# EAGLE board 04-bottom (EAGLE 9.6.2)
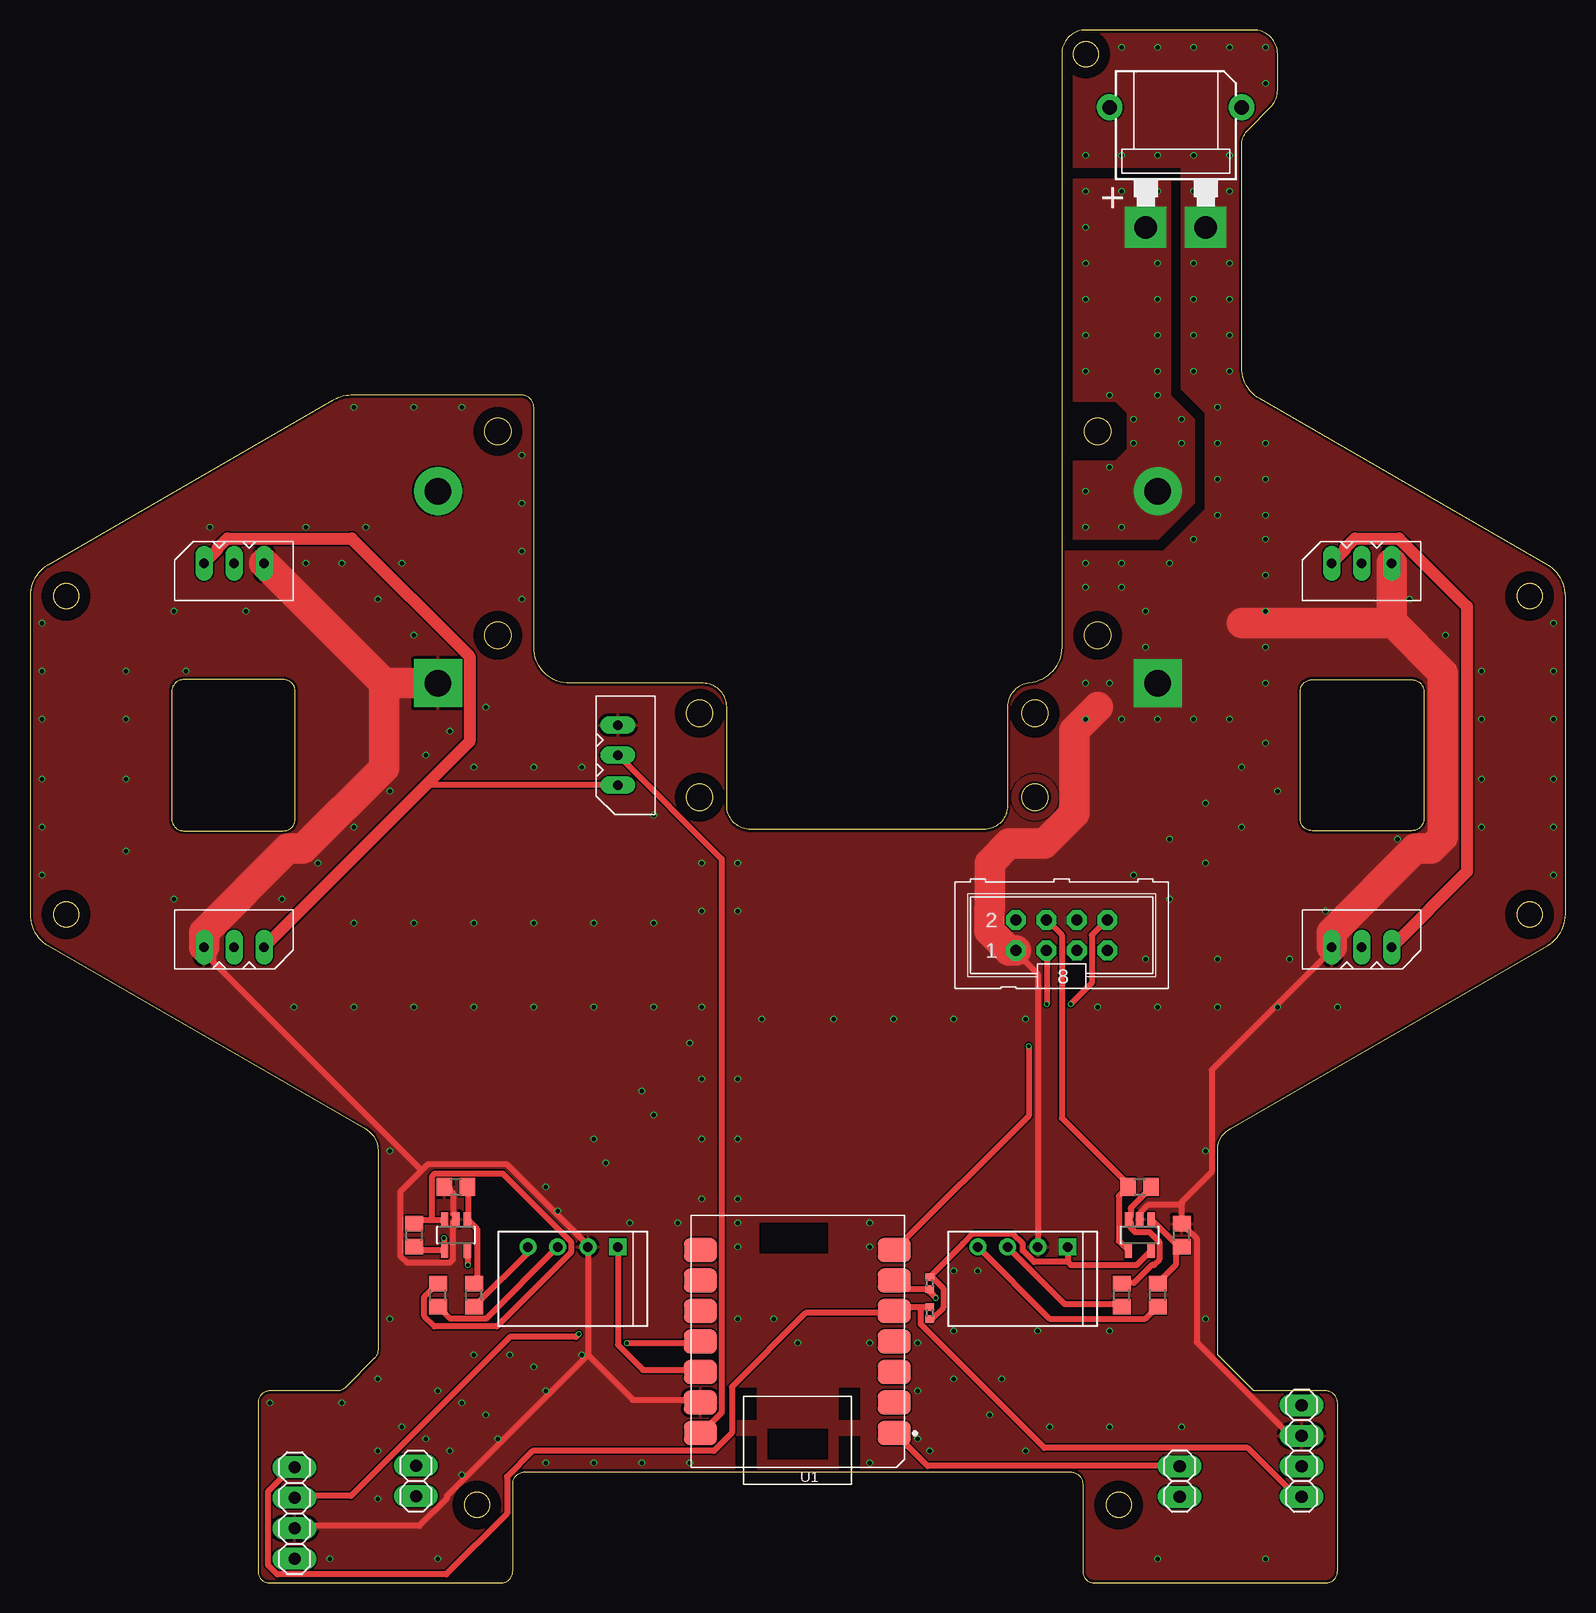
[diagram p0: board, top side]
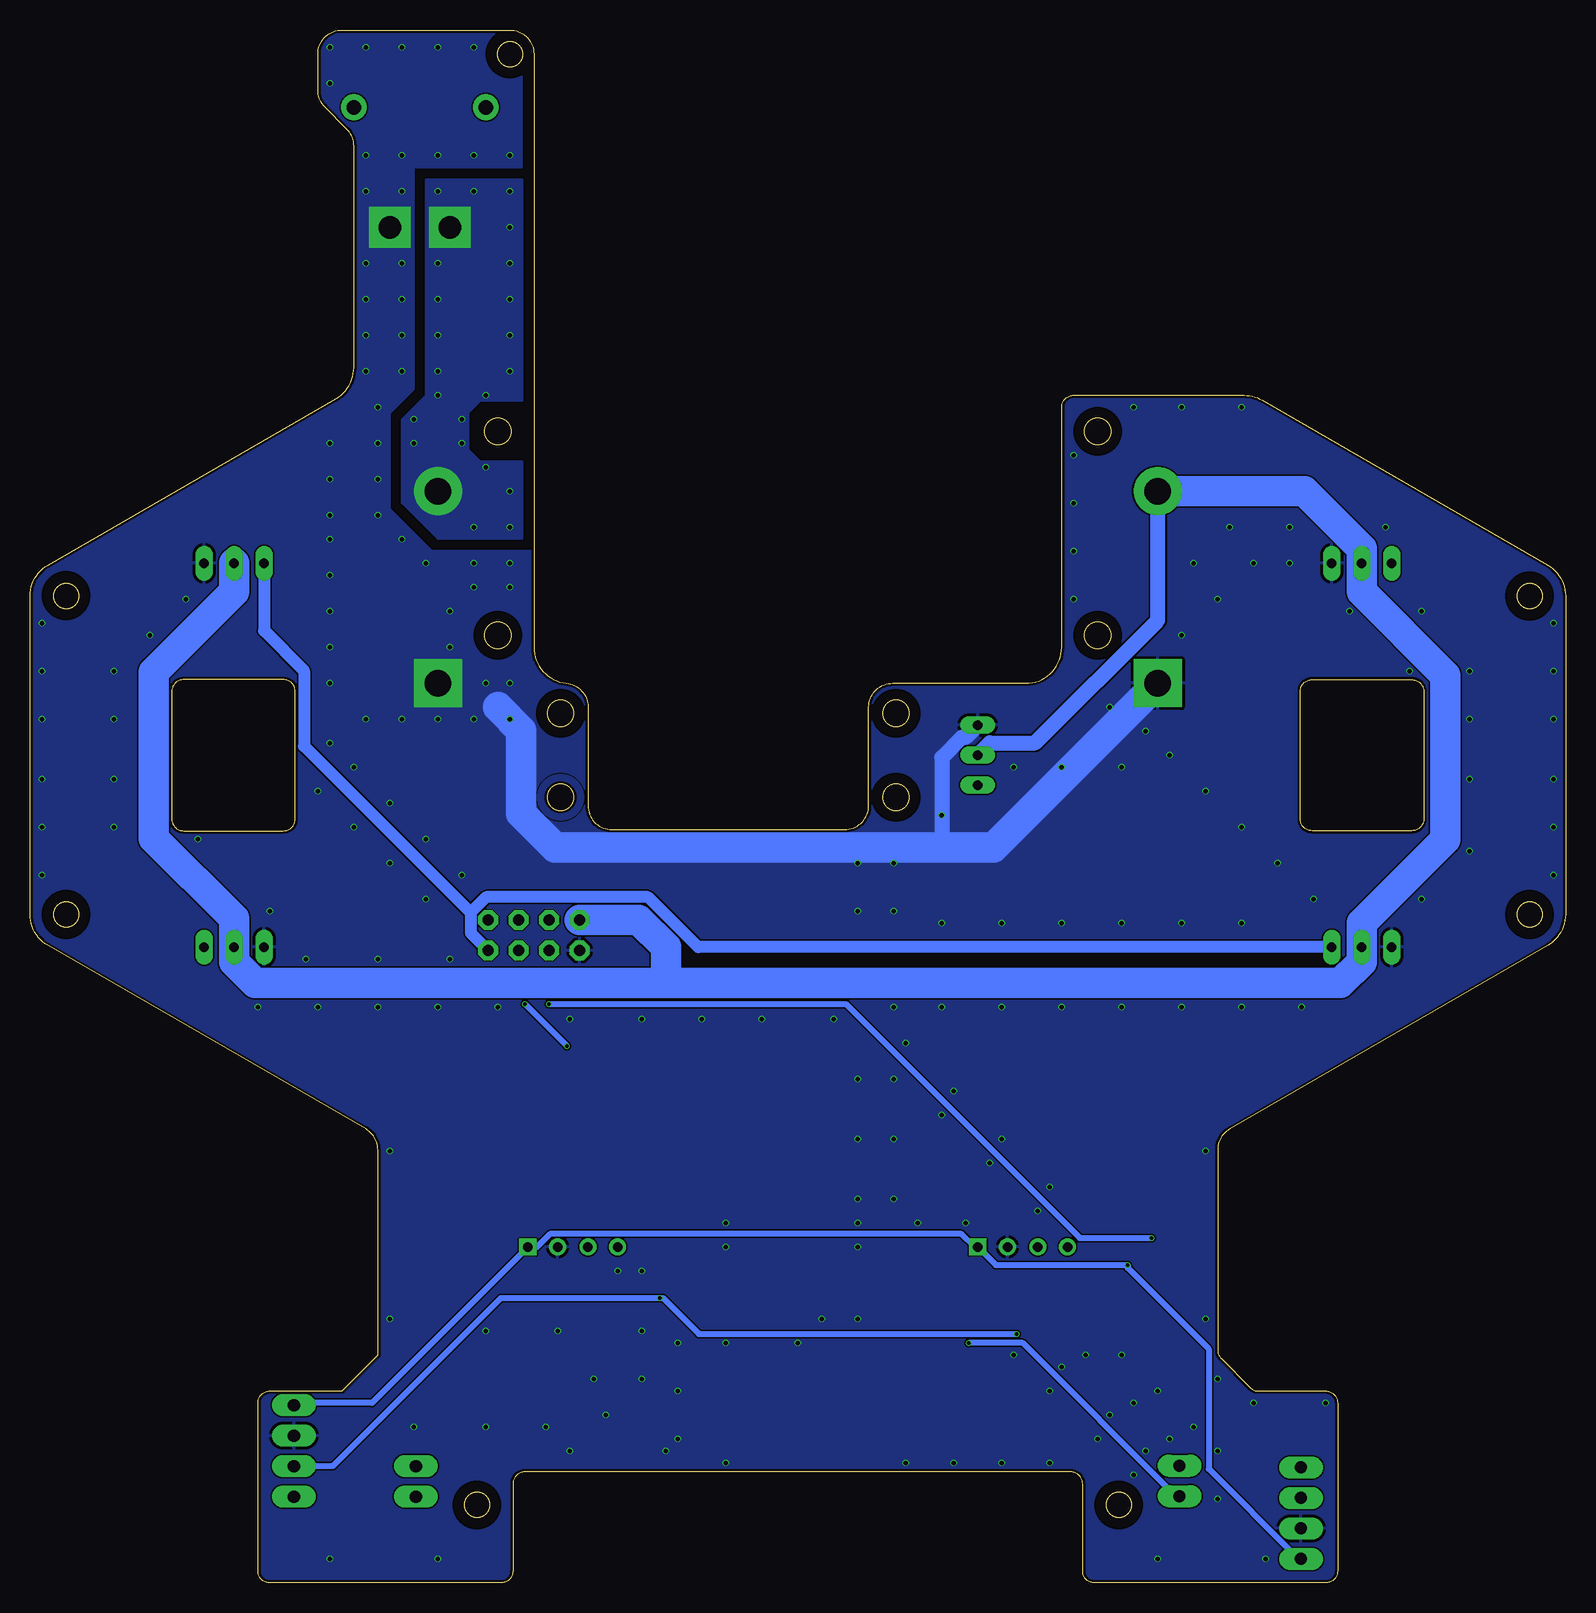
[diagram p1: board, bottom side, seen from below]

Size 128 x 129.45 mm. Coordinates in mm from the lower left corner, seen from the top.
Outline: 106.88,75.3 115.19,75.3 arc-90 116.19,74.3 116.19,63.7 arc-90 115.19,62.7 106.88,62.7 arc-90 105.88,63.7 105.88,74.3 arc-90 106.88,75.3
Outline: 22.12,74.3 arc90 21.12,75.3 12.81,75.3 arc90 11.81,74.3 11.81,63.7 arc90 12.81,62.7 21.12,62.7 arc90 22.12,63.7 22.12,74.3
Outline: 109,15 arc90 108,16 102,16 99,19 99,36.1 arc-60 100,37.83 126.5,53.13 arc60 128,55.73 128,82.27 arc60 126.5,84.87 102.5,98.72 arc-60 101,101.32 101,119.78 arc-45 101.59,121.19 103.41,123.02 arc45 104,124.44 104,127.45 arc90 102,129.45 88,129.45 arc90 86,127.45 86,78 arc-84 83.29,75.01 arc84 81.49,73.02 81.49,64.8 arc-90 79.49,62.8 60.09,62.8 arc-90 58.09,64.8 58.09,73 arc90 56.09,75 45,75 arc-90 42,78 42,98 arc90 41,99 26.78,99 arc30 25.28,98.6 1.5,84.87 arc60 0,82.27 0,55.73 arc60 1.5,53.13 28,37.83 arc-60 29,36.1 29,19.41 arc-45 28.71,18.71 26.29,16.29 arc-45 25.59,16 20,16 arc90 19,15 19,1 arc90 20,0 39.25,0 arc90 40.25,1 40.25,8.25 arc-90 41.25,9.25 86.75,9.25 arc-90 87.75,8.25 87.75,1 arc90 88.75,0 108,0 arc90 109,1 109,15
Outline: circle at 39,96 radius 1.1
Outline: circle at 39,79 radius 1.1
Outline: circle at 89,79 radius 1.1
Outline: circle at 88,127.45 radius 1.05
Outline: circle at 90.75,6.5 radius 1.05
Outline: circle at 37.25,6.5 radius 1.05
Outline: circle at 3,55.73 radius 1.05
Outline: circle at 3,82.27 radius 1.05
Outline: circle at 125,55.73 radius 1.05
Outline: circle at 125,82.27 radius 1.05
Outline: circle at 89,96 radius 1.1
Outline: circle at 83.78,65.5 radius 1.1
Outline: circle at 83.78,72.5 radius 1.1
Outline: circle at 55.8,65.5 radius 1.1
Outline: circle at 55.8,72.5 radius 1.1
Copper layers (1*16): Top 0.035mm / dielectric 1.6mm / Bottom 0.035mm
Design rules "jlcpcb-2layers *": minimum track width 5mil, minimum drill 0.3mm, track to track 5mil, track to pad 5mil, pad to pad 5mil, via to via 5mil, smd to smd 5mil, copper to edge 0.2mm, drill to drill 6mil, minimum pad ring 10mil, minimum via ring 3mil, stop-mask expansion 4mil, vias tented up to drill 10mil, thermal gap 10mil
Net classes: 0 default: width 0.508 mm
bKeepout: area 123,80.3 to 127,84.3; area 87,94 to 91,98; area 87,77 to 91,81; area 37,77 to 41,81; area 37,94 to 41,98
tRestrict: area 1,80.3 to 5,84.3; area 123,53.7 to 127,57.7; area 1,53.7 to 5,57.7; area 81.8,70.5 to 85.8,74.5; area 86,125.5 to 90,129.5; area 35.2,4.5 to 39.2,8.5; area 88.8,4.5 to 92.8,8.5; area 123,80.3 to 127,84.3; area 87,94 to 91,98; area 87,77 to 91,81; area 37,77 to 41,81; area 37,94 to 41,98; area 81.8,63.5 to 85.8,67.5; area 53.8,63.5 to 57.8,67.5; area 53.8,70.5 to 57.8,74.5
bRestrict: area 53.8,63.5 to 57.8,67.5; area 81.8,63.5 to 85.8,67.5; area 53.8,70.5 to 57.8,74.5; area 86,125.5 to 90,129.5; area 88.8,4.5 to 92.8,8.5; area 35.2,4.5 to 39.2,8.5; area 1,53.7 to 5,57.7; area 1,80.3 to 5,84.3; area 123,53.7 to 127,57.7; area 81.8,70.5 to 85.8,74.5; area 87,77 to 91,81; area 37,94 to 41,98; area 123,80.3 to 127,84.3; area 37,77 to 41,81

## Footprints (pad centres in the part's own frame; a part is rotated, then mirrored left to right if it is on the bottom)
SOT23-5 = smd 0.6 x 1.2: 1 -0.95,-1.306; 2 0,-1.306; 3 0.95,-1.306; 4 0.95,1.306; 5 -0.95,1.306
ML6 = drill 0.914 octagon: 1 -3.81,-1.27; 2 -3.81,1.27; 3 -1.27,-1.27; 4 -1.27,1.27; 5 1.27,-1.27; 6 1.27,1.27; 7 3.81,-1.27; 8 3.81,1.27
GND = drill 2.2 pad 4 square: P$1 0,0
5267-3 = drill 0.8 long: P$1 0,0; P$2 2.5,0; P$3 5,0
CON_22057045_MOL = drill 0.787 pad 1.143 square: 1 0,0 | drill 0.787 pad 1.143: 2 -2.489,0; 3 -5.004,0; 4 -7.493,0
1X04 = drill 1.016 long: 1 -3.81,0; 2 -1.27,0; 3 1.27,0; 4 3.81,0
1X02 = drill 1.016 long: 1 -1.27,0; 2 1.27,0
R0805 = smd 1.3 x 1.5: 1 -0.95,0; 2 0.95,0
R0402 = smd 0.6 x 0.7: 1 -0.5,0; 2 0.5,0
MOUDLE14P-2.54-21X17.8MM = smd 2.75 x 2: 1 0.835,18.12; 2 0.835,15.58; 3 0.835,13.04; 4 0.835,10.5; 5 0.835,7.96; 6 0.835,5.42; 7 0.835,2.88; 8 17,2.88; 9 17,5.42; 10 17,7.96; 11 17,10.5; 12 17,13.04; 13 17,15.58; 14 17,18.12
VDD = drill 2.2 pad 4: P$1 0,0
XT-30_L = drill 1.9 square: 1 3,-10; 2 8,-10 | drill 1.2: P$1 0,0; P$2 11,0

## Placement (x,y rotation side)
AMP1  NJU77551F  [SOT23-5]  92.5,29 180 top
AMP2  NJU77551F  [SOT23-5]  35.5,29 180 top
CN1  ML8-R  [ML6]  86,54 0 top
GND1  PAD_GND  [GND]  34,75 0 top
GND2  PAD_GND  [GND]  94,75 0 top
J1  5267-3  [5267-3]  19.5,53 180 top
J2  5267-3  [5267-3]  14.5,85 0 top
J3  5267-3  [5267-3]  108.5,85 0 top
J4  5267-3  [5267-3]  113.5,53 180 top
J5  22057045  [CON_22057045_MOL]  86.5,28 0 top
J6  22057045  [CON_22057045_MOL]  49,28 0 top
J7  5267-3  [5267-3]  49,66.5 90 top
JP1  [1X04]  22.06,5.83 90 top
JP2  [1X02]  32.17,8.5 90 top
JP3  [1X04]  106,11 270 top
JP4  [1X02]  95.84,8.46 270 top
R1  1k  [R0805]  94,24 90 top
R2  1k  [R0805]  91,24 90 top
R3  330k  [R0805]  96,29 90 top
R4  330k  [R0805]  92.5,33 180 top
R5  1k  [R0805]  37,24 90 top
R6  1k  [R0805]  34,24 90 top
R7  330k  [R0805]  35.5,33 180 top
R8  330k  [R0805]  32,29 270 top
R9  10k  [R0402]  75,22.5 270 top
R10  10k  [R0402]  75,25 90 top
U1  [MOUDLE14P-2.54-21X17.8MM]  72.89,30.63 180 top
VDD1  PAD_VDD  [VDD]  34,91 0 top
VDD_IN  PAD_VDD  [VDD]  94,91 0 top
XT1  XT-30_L  [XT-30_L]  90,123 0 top

## Library data of the parts
AMP1 AMP2 = NJU77551F
CN1 = ML8
GND1 GND2 VDD1 VDD_IN = M2-CONN
J1-J4 J7 = con-molex-spox
J5 J6 = con-molex-5268; COPYRIGHT: Copyright (C) 2022 Ultra Librarian. All rights reserved.; MANUFACTURER_PART_NUMBER: 22057045; MFR_NAME: Molex Connector Corporation
JP1-JP4 = pinhead
R1-R10 = rcl; SPICEPREFIX: R
U1 = Seeeduino XIAO
XT1 = XT-30

## Nets
+3V3: AMP1.5 AMP2.5 J5.1 J6.1 JP1.1 JP3.1 R9.2 R10.2 U1.12
BATT+: VDD_IN.P$1 XT1.1
GND: AMP1.2 AMP2.2 CN1.1 GND1.P$1 GND2.P$1 J1.P$3 J2.P$3 J3.P$3 J4.P$3 J5.2 J6.2 J7.P$3 JP1.2 JP3.2 R3.2 R7.2 U1.13 XT1.2
LED-FLOOR: CN1.6
LOADCELL-L: AMP1.4 CN1.4 R4.2
LOADCELL-R: AMP2.4 CN1.3 R8.2
MIRROR: CN1.8 U1.7
N$1: J5.3 R2.1
N$2: J5.4 R1.1
N$3: AMP1.3 R2.2 R4.1
N$4: AMP1.1 R1.2 R3.1
N$5: J6.3 R6.1
N$6: J6.4 R5.1
N$7: AMP2.3 R6.2 R8.1
N$8: AMP2.1 R5.2 R7.1
SCL: JP1.3 JP3.3 R10.1 U1.6
SDA: JP1.4 JP3.4 R9.1 U1.5
SERVO-SIG: CN1.7 J1.P$1 J2.P$1 J3.P$1 J4.P$1 J7.P$1
SIG-FLOOR: CN1.5
VDD: CN1.2 J1.P$2 J2.P$2 J3.P$2 J4.P$2 J7.P$2 U1.14 VDD1.P$1
XSHUT1: JP2.1 U1.11
XSHUT2: JP4.1 U1.1

## Tracks (layer width: path | path; a pad name or v marks a point on that pad's centre or on a via)
+3V3  (via drill 0.3)
  Top 0.508: J5.1 86.5,26.75 | v36.5,26.5 36.5,27.5 AMP2.5 | U1.12 55.73,17.75 51.1,17.75 49,19.85 J6.1 | R9.2 75.19,22 76.14,22.95 76.14,24.55 75.19,25.5 R10.2 77.75,28.25 77.75,28.28 78.56,29.09 81.95,29.09 82.75,28.29 82.75,27.72 83.72,26.75 86.5,26.75 | AMP1.5 92.25,26.5 86.75,26.5 86.5,26.75
  Bottom 0.508: JP1.1 22.3,2.25 22.5,2.25 29.75,9.5 29.75,19.5 36.5,26.25 v36.5,26.5 47.5,26.5 J6.1 49.25,28 50.34,29.09 84.66,29.09 85.75,28 J5.1 99.5,15 105.81,15 JP3.1
BATT+  (via drill 0.35)
  other vias: 88,116 88,113 88,110 88,107 88,104 88,101 90,99 92,97 92,95 90,93 88,91 88,88 91,88 96,95 96,97 94,99 94,101 94,104 94,107 94,110 94,116 91,116
  pour Bottom (no thermals): 87,87 94,87 97,90 97,97 95,99 95,117 87,117 87,98.5 90.5,98.5 91.5,97.5 91.5,94.5 90.5,93.5 87,93.5
  pour Top (no thermals): 87,117 95,117 95,99 97,97 97,90 94,87 87,87 87,93.5 90.5,93.5 91.5,94.5 91.5,97.5 90.5,98.5 87,98.5
GND  (via drill 0.35)
  Top 0.508: 55.89,15 U1.13 55.69,15.25 50.25,15.25 46.5,19 | R7.2 34.75,33 35.25,32.5 35.25,30.75 35.5,30.5 AMP2.2 35.25,30.06 35.25,26.95 35.01,26.71 31.4,26.71 30.87,27.24 30.87,32.62 32.62,34.38 | 96,31.5 R3.2 96.87,29.08 96.91,29.08 97.25,28.74 97.25,20.07 104.82,12.5 105.77,12.5 JP3.2 | 96,31.5 96,31.75 98.5,34.25 98.5,42.75 108.5,52.75 J4.P$3 | J5.2 84,50.75 83,51.75 CN1.1 | 32.62,34.38 15.25,51.75 15.25,52.25 J1.P$3 | 32.62,34.38 33.14,34.88 39.76,34.88 46.5,28.15 46.5,28.01 J6.2 46.5,27.99 46.5,19 | 96,31.5 93.2,31.5 92.5,30.8 AMP1.2 | JP1.2 22.26,4.75 32.44,4.75 34.75,7.06 34.75,7.25 46.5,19
  Top 2.54: J2.P$3 29.5,75 | 29.5,75 GND1.P$1 | 29.5,75 29.5,67.95 22.75,61.2 21.49,61.2 14.5,54.21 J1.P$3 | J3.P$3 113.5,80.12 | 113.5,80.12 117.79,75.83 117.79,62.17 116.83,61.2 115.49,61.2 108.5,54.21 J4.P$3 | 89,73 87.07,71.07 87.07,64.14 84.56,61.62 81.62,61.62 80,60 80,56.22 79.97,56.19 79.97,54.35 81.59,52.73 CN1.1 | 113.5,80.12 113.38,80 101,80
  Bottom 1.27: J7.P$3 50.02,70.48 50.33,70.48 52,68.82 52,61.3
  Bottom 2.54: 89,73 87.07,71.07 87.07,64.14 84.24,61.3 52,61.3 47.7,61.3 GND1.P$1
  other vias: 88,119 91,119 94,119 97,119 97,116 91,128 94,128 97,128 100,128 103,128 103,125 100,119 100,116 97,101 97,104 97,107 97,110 100,110 100,107 100,104 100,101 99,98 99,95 99,92 99,89 97,87 95,85 88,85 91,85 88,83 91,83 93,81 93,78 90,75 88,75 88,72 91,72 94,72 97,72 100,72 103,75 103,78 103,81 103,84 103,87 103,89 103,92 103,95 1,59 1,80 1,76 1,63 1,67 1,72 127,59 127,80 127,76 127,63 127,67 127,72 43,10 47,10 51,10 55,10 70,10 25,2 34,2 94,2 103,2 30,22 30,36 98,22 98,36 77,21 77,26 79,26 84,21 90,21 81,17 85,13 90,13 96,13 74,20 74,12 75,11 83,11 80,14 77,17 74,16 21,57 24,60 27,63 30,66 33,69 35,71 23,85 26,85 29,82 32,79 41,82 41,94 41,90 41,86 27,98 36,98 32,98 37,68 46,68 42,68 38,73 15,88 23,88 28,88 31,85 52,64 56,60 56,56 56,48 56,42 56,37 56,32 59,32 59,37 59,42 59,56 59,60 22,48 27,48 32,48 37,48 42,48 47,48 52,48 27,55 32,55 37,55 42,55 47,55 52,55 105,52 93,52 99,52 92,59 103,70 98,65 95,62 101,68 95,57 98,60 101,63 104,66 114,62 108,56 115,82 118,79 121,76 121,63 121,72 121,67 43,33 47,37 51,41 44,31 48,35 52,39 55,45 33,12 40,19 36,15 35,11 38,14 42,18 31,13 34,16 37,19 29,11 29,17 20,15 26,15 29,7 36,9 39,12 43,16 46,19 64,20 70,20 59,22 62,22 59,28 70,28 70,30 59,30 50,30 54,30 61,47 83,47 72,47 67,47 77,47 89,48 109,48 99,48 94,48 104,48 12,57 8,61 8,76 8,72 8,67 12,81 13,76 18,81
  pour Top (no thermals): 96,118 87,118 87,130 104,130 104,73 102,71 87,71 87,76 90,76 92,78 92,80 90,82 87,82 87,86 94.5,86 98,89.5 98,97.5 96,99.5
  pour Bottom (no thermals): 87,118 87,130 104,130 104,73 102,71 87,71 87,76 90,76 92,78 92,80 90,82 87,82 87,86 94.5,86 98,89.5 98,97.5 96,99.5 96,118
  pour Top: -3,101 43,101 44,100 58,86 87,86 94.5,86 98,89.5 98,97.5 96,99.5 96,118 87,118 87,130 105,130 130,105 130,-2 3,-2 -7,-2 -7,101
  pour Bottom: -5,103 44,103 44,86 94.5,86 98,89.5 98,97.5 96,99.5 96,118 87,118 87,130 105,130 105,100 130,100 130,-1 -3,-1 -6,-1 -6,103
LOADCELL-L
  Top 0.508: AMP1.4 91.5,27.75 90.75,28.5 90.75,32.25 91.5,33 R4.2 91.5,33.25 86,38.75 86,54 CN1.4
LOADCELL-R  (via drill 0.3)
  Top 0.508: R8.2 32,27.75 34.5,27.75 AMP2.4 34.5,28 v34.5,28.75 | v84.75,48.25 84.75,52.5 CN1.3
  Bottom 0.508: v34.5,28.75 40.5,28.75 60,48.25 v84.75,48.25
MIRROR  (via drill 0.3)
  Top 0.508: v86.75,48.25 88.5,50 88.5,54 89.75,55.25 CN1.8 | v83.25,44.75 83.25,38.95 U1.7
  Bottom 0.508: v86.75,48.25 v83.25,44.75
N$1
  Top 0.508: R2.1 90.8,23.25 86.25,23.25 J5.3
N$2
  Top 0.508: J5.4 84.99,22.02 92.97,22.02 R1.1
N$3
  Top 0.508: R4.1 93.25,32.8 93.25,32.75 91.75,31.25 91.75,30.51 AMP1.3 91.75,30.11 91.75,29.62 92.12,29.25 93.33,29.25 94.13,28.45 94.13,26.94 93.69,26.5 93.5,26.5 92,25 91.05,25 R2.2
N$4
  Top 0.508: AMP1.1 93.5,30.25 95.5,28.25 96,28.25 R3.1 95.5,28 95.5,26.5 94,25 R1.2
N$5
  Top 0.508: R6.1 35.03,22.02 38.02,22.02 J6.3
N$6
  Top 0.508: J6.4 41.5,27.51 37.24,23.25 37.2,23.25 R5.1
N$7
  Top 0.508: 33.5,30.25 32,30.25 R8.1 | 33.5,30.25 34.5,30.25 AMP2.3 | 33.5,30.25 33.5,33.89 33.74,34.13 39.41,34.13 45.09,28.45 45.09,27.55 38.92,21.38 33.73,21.38 32.87,22.24 32.87,23.86 33.76,24.75 33.8,24.75 R6.2
N$8
  Top 0.508: R7.1 36.5,33 36.5,30.5 AMP2.1 36.5,30.25 37.25,29.5 37.25,25.25 37,25 R5.2
SCL  (via drill 0.3)
  Top 0.508: U1.6 72.25,25 72.25,24.5 R10.1 75,24.25 v75.5,23.75 | JP1.3 22.22,7.25 26.75,7.25 40,20.5 45.5,20.5 v45.75,20.75
  Bottom 0.508: v45.75,20.75 72.25,20.75 75.25,23.75 v75.5,23.75 88.75,23.75 102.75,9.75 105.98,9.75 JP3.3
SDA
  Top 0.508: 74.25,23 72.25,23 72.25,22.75 U1.5 71.89,22.5 64.66,22.5 58.5,16.34 58.5,12.5 57,11 41.9,11 39.75,8.85 39.75,5.78 34.69,0.72 20.61,0.72 19.85,1.48 19.85,7.63 21.72,9.5 21.92,9.5 JP1.4 | 74.25,23 R9.1 | JP3.4 105.94,7.25 105.5,7.25 101.5,11.25 84.56,11.25 74.25,21.56 74.25,23
SERVO-SIG
  Top 0.508: J7.P$1 33,66.5 32.75,66.25
  Top 1.016: J2.P$1 15.65,86.14 15.65,86.28 16.44,87.08 26.82,87.08 36.64,77.26 36.64,70.14 32.75,66.25 J1.P$1 | J3.P$1 109.65,86.14 109.65,86.28 110.44,87.08 114.12,87.08 119.79,81.4 119.79,59.29 J4.P$1
  Bottom 1.016: J1.P$1 72.31,53 76.48,57.17 89.97,57.17 91.27,55.87 | 91.27,55.87 91.27,54.19 CN1.7 | 91.27,55.87 105.15,69.75 105.15,76.03 108.5,79.38 J3.P$1
VDD
  Top 0.508: U1.14 56.13,12.75 56.21,12.75 57.65,14.19 57.65,60.35 J7.P$2
  Bottom 1.27: J7.P$2 47.98,70.02 44.21,70.02 34,80.23 VDD1.P$1
  Bottom 2.54: J3.P$2 111,82.62 117.69,75.93 117.69,62.07 111,55.38 J4.P$2 111,51.79 109.21,50 75,50 | CN1.2 77.27,55.27 75,53 75,50 | VDD1.P$1 21.79,91 17,86.21 J2.P$2 17,82.62 10.01,75.63 10.01,61.99 17,55 J1.P$2 17,51.79 18.79,50 75,50
XSHUT1  (via drill 0.3)
  Top 0.508: v49.75,20 55.75,20 U1.11
  Bottom 0.508: v49.75,20 45.25,20 32.48,7.23 JP2.1
XSHUT2
  Top 0.508: JP4.1 95.82,9.75 74.81,9.75 U1.1